# Altium PCB Copy of PCB1.PcbDoc
Units mm, origin at the board's own origin, x right, y up, seen from the top; angles counter-clockwise.
Board outline 113.03 x 60.96 mm, 2 copper layers (L1, L2); 29 components, 32 nets, 145 pads, 8 vias.
Unrouted connection lines stored in the file: 48.
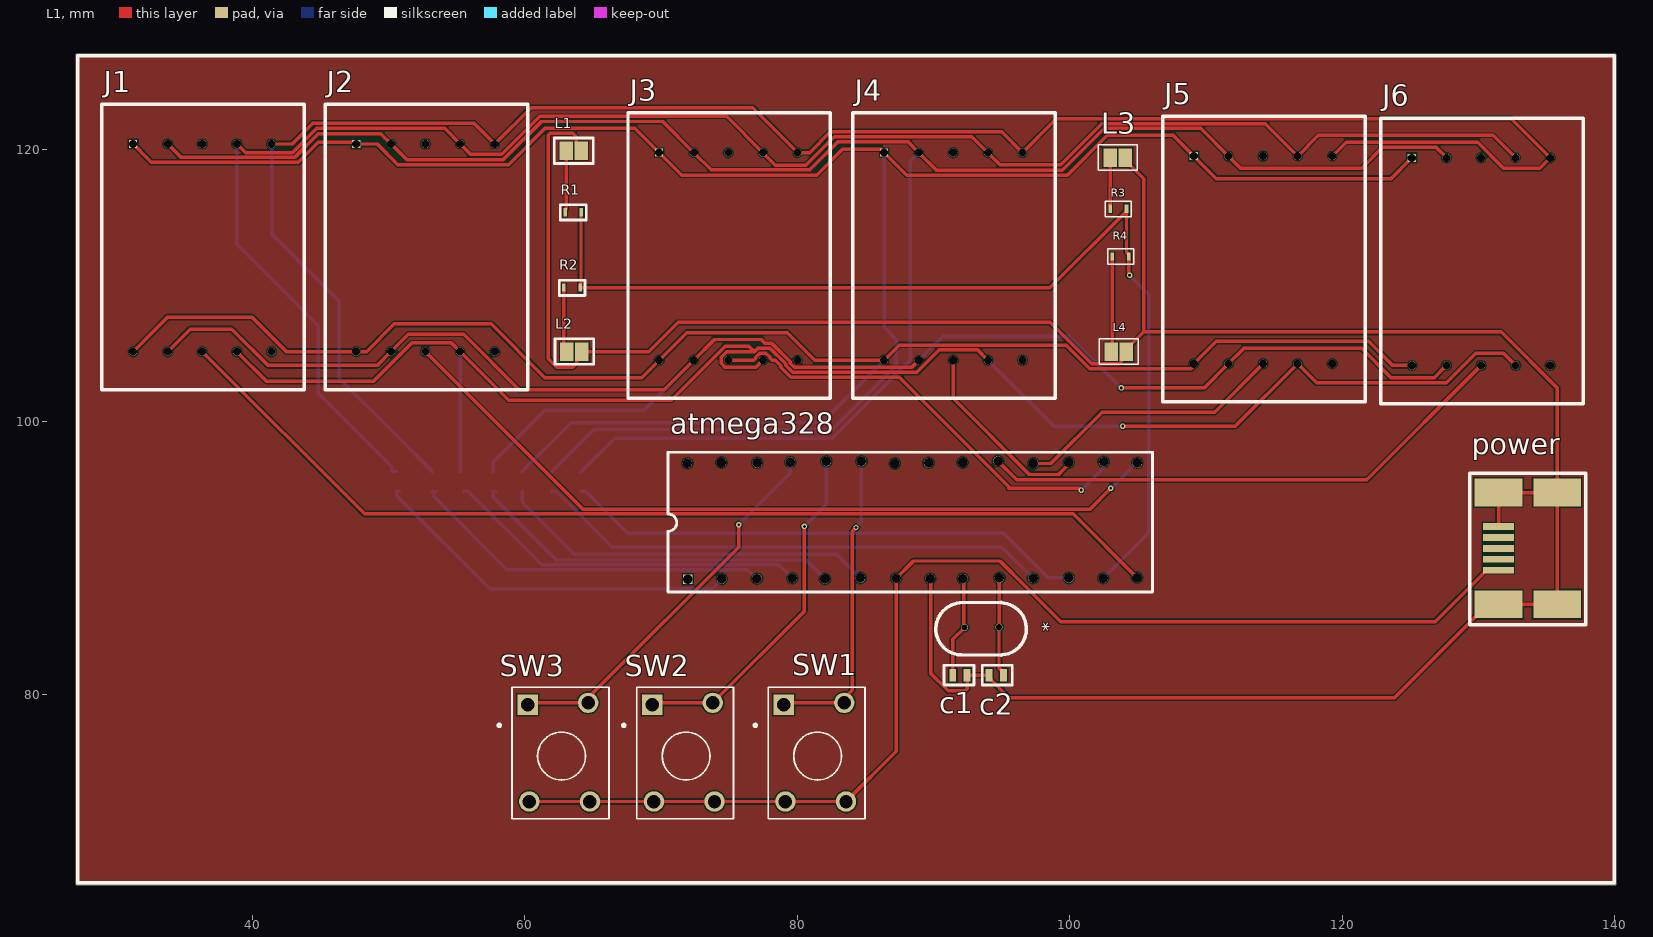
[diagram p0: L1 view]
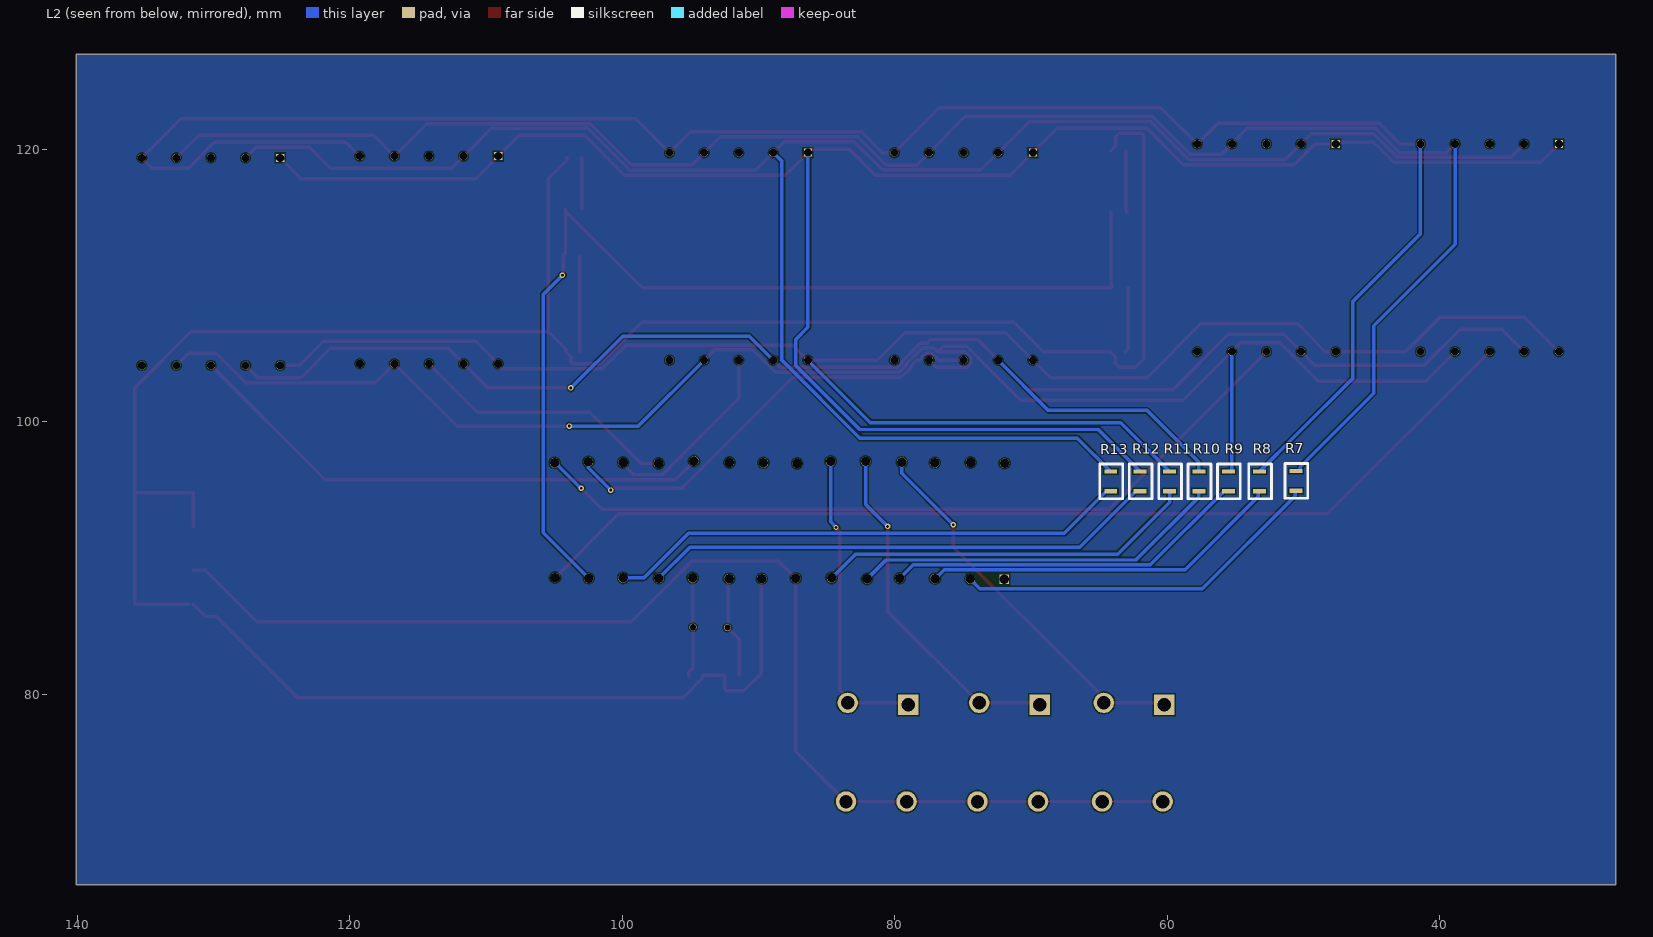
[diagram p1: L2 view, seen from below]

## Layer stack, top to bottom
Top Solder: solder mask 0.0102, Solder Resist, Dk 3.5
L1: signal copper 0.0356
Dielectric 1: dielectric 0.32, FR-4, Dk 4.8
L2: signal copper 0.0356
Bottom Solder: solder mask 0.0102, Solder Resist, Dk 3.5

## Board outline
27.051,66.04 140.081,66.04 140.081,127 27.051,127

## Design rules (kind name [scope] priority, off if disabled: settings)
Clearance [All] p1: gap=0.1 ignorepadtopadclearanceinfootprint=FALSE
PolygonConnect [All] p1: connectstyle=Relief reliefconductorwidth=0.254 reliefentries=4 polygonreliefangle="90 Angle" airgapwidth=0.254
RoutingVias [All] p1: holewidth=0.2 width=0.4 viastyle="Through Hole" minholewidth=0.2 minwidth=0.4 maxholewidth=0.2 maxwidth=0.4
SolderMaskExpansion [All] p1: expansion=0.102 istentingtop=FALSE
Width [All] p1: maxlimit=0.5 minlimit=0.254 preferedwidth=0.254
30 further rules are at their usual default settings.

## Components (designator, comment, footprint, x,y, rotation, side; value= is the part's Value field where it differs from the comment)
* "crystal_osci" CRYSTAL_16MHZ 93.472,84.328 r180 top
atmega328 "atmega328p" IC_BASE_HOLDER 71.774,88.794 r90 top
c1 "12pF" CAPACITOR0805_12PF 91.956,81.407 r0 top
c2 "12pF" CAPACITOR0805_12PF 94.573,81.407 r180 top
J1 "7_seg_display_comm_cath" 7SEG 31.242,120.396 r0 top
J2 "7_seg_display_comm_cath" 7SEG 47.625,120.396 r0 top
J3 "7_seg_display_comm_cath" 7SEG 69.85,119.761 r0 top
J4 "7_seg_display_comm_cath" 7SEG 86.36,119.761 r0 top
J5 "7_seg_display_comm_cath" 7seg 109.093,119.507 r0 top
J6 "7_seg_display_comm_cath" 7seg 125.095,119.38 r0 top
L1 "RED_led" "LED_LSM0805 SERIES_RED" 63.585,119.888 r0 top
L2 "RED_led" "LED_LSM0805 SERIES_RED" 63.627,105.156 r0 top
L3 "RED_led" "led_LSM0805 Series_red" 103.505,119.38 r0 top
L4 "RED_led" "led_LSM0805 Series_red" 103.59,105.156 r0 top
power "U5" USB_MINI_20 131.463,94.814 r180 top
R1 "resistor_150_smd" RESISTOR_150_SMD 63.5,115.316 r0 top
R2 "resistor_150_smd" RESISTOR_150_SMD 63.415,109.78 r0 top
R3 "resistor_150_smd" Resistor_150_smd 103.505,115.57 r0 top
R4 "resistor_150_smd" Resistor_150_smd 103.674,112.066 r0 top
R7 "resistor_1k_smd" RESISTOR_ERJUP3_1K 50.546,95.668 r270 bottom
R8 "resistor_1k_smd" RESISTOR_ERJUP3_1K 53.213,95.631 r270 bottom
R9 "resistor_1k_smd" RESISTOR_ERJUP3_1K 55.499,95.631 r270 bottom
R10 "resistor_1k_smd" RESISTOR_ERJUP3_1K 57.658,95.631 r270 bottom
R11 "resistor_1k_smd" RESISTOR_ERJUP3_1K 59.817,95.631 r270 bottom
R12 "resistor_1k_smd" RESISTOR_ERJUP3_1K 61.976,95.631 r270 bottom
R13 "resistor_1k_smd" RESISTOR_ERJUP3_1K 64.135,95.631 r270 bottom
SW1 "1825910-2" TE_1825910-2 78.232,77.724 r0 top
SW2 "1825910-2" TE_1825910-2 68.58,77.724 r0 top
SW3 "1825910-2" TE_1825910-2 59.436,77.724 r0 top

## Footprints (in the part's own frame and the unit in brackets; to place one, negate y for a bottom-side part, rotate by r counter-clockwise, add the part's x,y. Pads: shape width x height; smd on the part's side, far side on the other; paste and mask are expansions set on the pad)
7SEG [mm]
  rect 0.6x0.6 hole 0.6: 1(0,0)
  round 0.6 hole 0.6: 2(2.55,0) 3(5.08,0) 4(7.62,0) 5(10.16,0) 6(10.16,-15.24) 7(7.62,-15.24) 8(5.08,-15.24) 9(2.54,-15.24) 10(0,-15.24)
  silkscreen extent -2.29,-18.03 12.57,2.92, body extent -1.22,-17.12 11.38,1.88, height 8.82
7seg [mm]
  rect 0.6x0.6 hole 0.6: 1(0,0)
  round 0.6 hole 0.6: 2(2.55,0) 3(5.08,0) 4(7.62,0) 5(10.16,0) 6(10.16,-15.24) 7(7.62,-15.24) 8(5.08,-15.24) 9(2.54,-15.24) 10(0,-15.24)
  silkscreen extent -2.29,-18.03 12.57,2.92, body extent -1.22,-17.12 11.38,1.88, height 8.82
CAPACITOR0805_12PF [mm]
  rect 0.5x0.9 smd: 1(-0.55,0) 2(0.5,0)
  silkscreen extent -1.2,-0.72 1,0.73, body extent -0.83,-0.4 0.77,0.4, height 0.46
CRYSTAL_16MHZ [mm]
  round 0.5 hole 0.457: 1(-1.325,-0.6) 2(1.2,-0.575)
  silkscreen extent -3.33,-2.43 3.31,1.45, body extent -3.45,-2.57 3.35,1.43, height 1.81
IC_BASE_HOLDER [mm]
  rect 0.7x0.7 hole 0.7: 1(-0.35,-0.175)
  round 0.7 hole 0.7: 2(-0.325,-2.675) 3(-0.3,-5.25) 4(-0.275,-7.85) 5(-0.325,-10.25) 6(-0.25,-12.85) 7(-0.275,-15.475) 8(-0.3,-17.975) 9(-0.3,-20.37) 10(-0.25,-23.05) 11(-0.275,-25.525) 12(-0.25,-28.15) 13(-0.275,-30.675) 14(-0.225,-33.15) 15(8.2,-33.175) 16(8.275,-30.7) 17(8.225,-28.15) 18(8.15,-25.55) 19(8.325,-22.95) 20(8.225,-20.35) 21(8.2,-17.85) 22(8.15,-15.375) 23(8.3,-12.925) 24(8.3,-10.35) 25(8.25,-7.7) 26(8.2,-5.275) 27(8.225,-2.65) 28(8.17,-0.15)
  silkscreen extent -1.28,-34.29 8.98,1.27, body extent -0.9,-33.95 8.77,0.65, height 4
"LED_LSM0805 SERIES_RED" [mm]
  rect 1x1.35 smd: A(-0.55,0) K(0.55,0)
  silkscreen extent -1.43,-0.92 1.43,0.95, body extent -1.03,-0.62 0.97,0.62, height 1.11
"led_LSM0805 Series_red" [mm]
  rect 1x1.35 smd: A(-0.55,0) K(0.55,0)
  silkscreen extent -1.43,-0.92 1.43,0.95, body extent -1.03,-0.62 0.97,0.62, height 1.11
RESISTOR_150_SMD [mm]
  rect 0.26x0.6 smd: 1(-0.55,0.075) 2(0.65,0.075)
  silkscreen extent -0.9,-0.5 1,0.63, body extent -0.75,-0.32 0.85,0.48, height 0.46
Resistor_150_smd [mm]
  rect 0.26x0.6 smd: 1(-0.55,0.075) 2(0.65,0.075)
  silkscreen extent -0.9,-0.5 1,0.63, body extent -0.75,-0.32 0.85,0.48, height 0.46
RESISTOR_ERJUP3_1K [mm]
  rect 0.3x0.95 smd: 1(-0.725,0) 2(0.725,0)
  silkscreen extent -1.27,-0.8 1.28,0.87, body extent -0.8,-0.4 0.8,0.4, height 0.46
TE_1825910-2 [mil]
  rect 58.98x58.98 hole 38.98: 1(30,60)
  round 58.98 hole 38.98: 2(205,65) 3(35,-220) 4(210,-220)
  silkscreen extent -56,-270 265,110, body extent 2,-234 238,74, height 170
USB_MINI_20 [mm]
  rect 2.25x0.5 smd: 1(0,5.7) 2(0,2.5) 4(0,4.1) D+(0,4.9) D-(0,3.3)
  rect 3.5x2.05 smd: 2(-4.3,8.2) 2(-4.3,0) 2(0,8.2) 2(0,0)
  silkscreen extent -6.4,-1.4 2.1,9.7, body extent -8,-0.85 1.2,9.05, height 3.86

## Part data
c1 c2: library part capacitor12pico
power: library part "USB CONNECTOR"
SW1 SW2 SW3: "SWITCH TACTILE SPST-NO 0.05A 24V", Package=None, Availability=Unavailable, MP=1825910-2, Price=None

## Via types
v1: diameter 0.4, hole 0.2, L1 to L2, 8 vias

## Nets (pads, with @x,y where several pads share a name; then routed paths per layer and width w, separated by ;. In a path a pad name is that pad's centre, name@x,y a point inside that pad or via, vN(x,y) a via of type N, cw(c..) or ccw(c..) an arc to the next point about the centre after c; other vN are vias at no path point)
+5V: atmega328.7 power.1 SW1.3 SW1.4 SW2.3 SW2.4 SW3.3 SW3.4 | length 89.3
  L1 w0.254: SW3.3 SW3.4 SW2.3 SW2.4 SW1.3 SW1.4 87.249,75.819 atmega328.7 88.519,89.789 94.869,89.789 96.722,87.936 99.314,85.344 126.818,85.344 130.588,89.114 power.1
a: J1.4 J2.4 J3.4 J4.4 J5.4 J6.4 R7.1 | length 132.6
  L1 w0.254: J1.4 39.497,119.761 42.941,119.761 44.719,121.539 54.102,121.539 J2.4 56.007,119.634 58.293,119.634 61.087,122.428 74.803,122.428 J3.4 78.386,118.845 80.618,118.845 82.704,120.931 92.81,120.931 94.046,119.695 94.869,118.872 99.314,118.872 102.335,121.893 114.327,121.893 J5.4 118.237,121.031 131.064,121.031 J6.4
  L2 w0.254: J1.4 38.862,113.03 44.831,107.061 44.831,102.108 50.218,96.721 50.218,96.416 50.241,96.393 R7.1
a_com: atmega328.2 R7.2 | length 27.7
  L2 w0.15: R7.2 R7.2@50.871,94.943
  L2 w0.254: R7.2 50.577,94.943 50.6,94.92 50.6,94.561 57.404,87.757 73.737,87.757 atmega328.2
b: J1.5 J2.5 J3.5 J4.5 J5.5 J6.5 R8.1 | length 147.5
  L1 w0.254: J1.5 42.909,120.396 44.433,121.92 56.261,121.92 J2.5 60.452,123.063 76.708,123.063 J3.5 80.899,119.761 82.423,121.285 94.996,121.285 J4.5 99.006,122.247 132.388,122.247 J6.5 134.493,118.618 131.826,118.618 129.921,120.523 120.269,120.523 J5.5
  L2 w0.254: J1.5 41.402,113.804 46.355,108.851 46.355,103.214 50.509,99.06 R8.1
b_com: atmega328.3 R8.2 | length 27
  L2 w0.15: R8.2 R8.2@53.538,94.906
  L2 w0.254: R8.2 53.281,94.906 53.304,94.883 53.304,94.524 58.674,89.154 76.364,89.154 atmega328.3
c: J1.7 J2.7 J3.7 J4.7 J5.7 J6.7 R9.1 | length 122.3
  L1 w0.254: J1.7 41.021,102.997 48.895,102.997 51.689,105.791 54.61,105.791 J2.7 58.801,101.6 70.739,101.6 74.703,105.564 76.427,105.564 76.847,105.144 ; J3.7 76.943,103.994 74.712,103.994 74.403,104.303 74.403,104.739 74.808,105.144 76.847,105.144 ; J4.7 93.218,105.283 90.407,105.283 88.764,103.64 79.645,103.64 79.129,104.156 79.129,104.259 77.986,105.402 77.105,105.402 76.847,105.144 ; v1(103.886,99.695) 112.141,99.695 J5.7 118.11,102.87 127.635,102.87 129.794,105.029 131.826,105.029 J6.7
  L2 w0.254: R9.1@55.245,96.356 J2.7 ; J4.7 98.806,99.695 v1(103.886,99.695)
c_com: atmega328.4 R9.2 | length 26.8
  L2 w0.254: R9.2 55.824,94.906 61.222,89.508 78.635,89.508 atmega328.4
d: J1.9 J2.9 J3.9 J4.9 J5.9 J6.9 R10.1 | length 124.2
  L1 w0.254: J1.9 35.433,106.807 38.481,106.807 41.148,104.14 49.149,104.14 J2.9 51.435,106.426 55.499,106.426 59.563,102.362 70.231,102.362 J3.9 73.914,106.045 77.343,106.045 77.632,105.756 78.133,105.756 79.483,104.406 79.483,104.303 79.792,103.994 88.373,103.994 J4.9 ; v1(103.759,102.489) 109.855,102.489 J5.9 112.776,105.41 121.412,105.41 123.571,103.251 126.746,103.251 J6.9
  L2 w0.254: R10.1 57.658,97.028 59.563,98.933 61.468,100.838 68.707,100.838 J3.9 ; J4.9 90.678,106.299 99.949,106.299 v1(103.759,102.489)
D1: atmega328.14 J1.8 | length 75.5
  L1 w0.254: J1.8 48.233,93.245 100.248,93.245 atmega328.14
D2: atmega328.15 J2.8 | length 58.4
  L1 w0.254: J2.8 64.262,93.599 101.473,93.599 v1(102.997,95.123)
  L2 w0.254: v1(102.997,95.123) 103.037,95.123 104.908,96.994 atmega328.15
D3: atmega328.16 J3.8 | length 33.3
  L1 w0.254: J3.8 76.794,104.521 76.943,104.67 76.943,104.739 77.252,105.048 77.688,105.048 77.997,104.739 77.997,104.67 78.146,104.521 78.366,104.521 78.775,104.112 78.775,104.009 79.506,103.278 87.476,103.278 92.583,98.171 95.504,95.25 95.504,95.123 100.711,95.123 v1(100.838,94.996)
  L2 w0.254: v1(100.838,94.996) 102.474,96.632 atmega328.16
D4: atmega328.17 J4.8 | length 14
  L1 w0.254: J4.8 91.44,101.727 97.028,96.139 99.165,96.139 99.479,96.453 ; 99.479,96.454 99.924,96.898 atmega328.17
D5: atmega328.18 J5.8 | length 19.9
  L1 w0.254: atmega328.18 98.595,96.944 102.362,100.711 110.617,100.711 J5.8
D6: atmega328.19 J6.8 | length 39.5
  L1 w0.254: atmega328.19 96.085,95.758 121.793,95.758 J6.8
d_com: atmega328.5 R10.2 | length 27.6
  L2 w0.15: R10.2 R10.2@57.983,94.906
  L2 w0.254: R10.2 57.658,94.488 62.284,89.862 80.631,89.862 atmega328.5
e: J1.10 J2.10 J3.10 J4.10 J5.10 J6.10 R11.1 | length 133.2
  L1 w0.254: J1.10 32.736,106.65 33.782,107.696 39.958,107.696 42.498,105.156 J2.10 48.387,105.156 50.419,107.188 57.531,107.188 61.468,103.251 68.58,103.251 J3.10 71.882,106.553 79.248,106.553 81.28,104.521 J4.10 87.476,105.637 99.722,105.637 101.459,103.9 108.899,103.9 J5.10@109.093,104.094 ; J5.10 110.744,105.918 121.92,105.918 123.698,104.14 J6.10
  L2 w0.254: R11.1 63.41,99.949 81.788,99.949 J4.10
e_com: atmega328.6 R11.2 | length 27.9
  L2 w0.254: R11.2 59.817,94.488 59.817,94.107 63.627,90.297 82.871,90.297 atmega328.6
f: J1.2 J2.2 J3.2 J4.2 J5.2 J6.2 R13.1 | length 146.6
  L1 w0.254: J1.2 34.781,119.407 43.087,119.407 44.838,121.158 49.413,121.158 J2.2 51.345,119.226 58.393,119.226 61.214,122.047 70.114,122.047 J3.2 73.67,118.491 80.899,118.491 82.985,120.577 88.094,120.577 J4.2 90.207,118.464 99.441,118.464 102.516,121.539 109.611,121.539 J5.2 111.643,119.497 112.522,118.618 121.412,118.618 122.946,120.152 126.873,120.152 J6.2
  L2 w0.254: R13.1 66.585,98.806 82.55,98.806 88.265,104.521 88.265,119.116 J4.2
f_com: atmega328.11 R12.2 | length 38
  L2 w0.254: R12.2 62.301,94.906 66.402,90.805 95.013,90.805 atmega328.11
g: J1.1 J2.1 J3.1 J4.1 J5.1 J6.1 R12.1 | length 147.4
  L1 w0.254: J1.1 32.385,119.253 32.585,119.053 43.361,119.053 44.831,120.523 47.498,120.523 J2.1 49.149,120.396 50.673,118.872 58.803,118.872 61.47,121.539 68.072,121.539 J3.1 71.501,118.11 81.407,118.11 83.312,120.015 86.106,120.015 J4.1 88.011,118.11 99.822,118.11 102.743,121.031 107.569,121.031 110.744,117.856 123.571,117.856 J6.1
  L2 w0.254: R12.1 65.061,99.441 82.55,99.441 87.249,104.14 87.249,106.045 86.36,106.934 J4.1
g_com: atmega328.12 R13.2 | length 38.4
  L2 w0.254: R13.2 64.46,94.906 67.545,91.821 95.123,91.821 98.4,88.544 atmega328.12
GND: atmega328.8 c1.2 c2.2 L1.K L2.K L3.K L4.K power.2 | length 193.8
  L1 w0.254: L1.K 63.762,120.261 63.762,120.923 63.5,121.185 61.871,121.185 61.722,121.036 61.722,104.641 62.35,104.013 63.5,104.013 63.804,104.317 63.804,104.783 L2.K 69.088,105.156 71.247,107.315 98.552,107.315 101.613,104.254 103.634,104.254 103.767,104.387 103.767,104.783 L4.K 104.14,105.331 105.41,106.601 ; atmega328.8 89.789,88.454 89.789,81.534 91.059,80.264 92.307,80.264 92.456,80.413 c1.2 c2.2 94.073,81.207 95.524,79.756 123.825,79.756 129.785,85.716 130.565,85.716 power.2@131.463,86.614 ; L3.K 104.055,119.205 105.41,117.85 105.41,106.601 ; power.2@131.463,92.314 131.463,94.814 power.2@135.763,94.814 ; power.2@131.826,86.614 135.763,86.614 power.2@135.763,94.814 ; 105.41,106.601 131.651,106.601 135.763,102.489 power.2@135.763,94.814
led: atmega328.13 R1.2 R2.2 R3.2 R4.2 | length 77.2
  L1 w0.254: R1.2 64.147,115.388 64.147,115.138 64.115,115.105 64.115,110.155 64.068,110.108 64.068,109.858 R2.2 98.535,109.855 104.152,115.472 R3.2@104.155,115.475 ; R3.2 R3.2@104.155,115.475 ; v1(104.376,110.762) 104.376,110.801 104.324,110.854 104.324,112.311 104.321,112.314 104.304,112.314 104.155,112.463 R3.2@104.155,115.475
  L2 w0.254: atmega328.13 105.791,91.861 105.791,109.347 v1(104.376,110.762)
Net*_1: *.1 atmega328.10 c2.1 | length 7.3
  L1 w0.254: atmega328.10 94.81,88.531 94.81,84.941 *.1 94.797,81.933 95.123,81.607 c2.1 c2.1@95.151,81.435
Net*_2: *.2 atmega328.9 c1.1 | length 7.5
  L1 w0.254: c1.1 91.406,84.037 *.2 92.225,84.95 92.225,88.413 atmega328.9
Netatmega328_23: atmega328.23 SW1.1 SW1.2 | length 22.7
  L1 w0.254: SW1.1 79.121,79.375 SW1.2 83.439,79.712 84.036,80.309 84.036,91.954 84.3,92.218 v1(84.3,92.248)
  L2 w0.254: v1(84.3,92.248) 84.3,92.272 84.699,92.671 atmega328.23
Netatmega328_24: atmega328.24 SW2.1 SW2.2 | length 25.7
  L1 w0.254: SW2.1 69.469,79.375 SW2.2 80.518,86.106 v1(80.518,92.329)
  L2 w0.254: v1(80.518,92.329) 82.124,93.935 atmega328.24
Netatmega328_25: atmega328.25 SW3.1 SW3.2 | length 28.3
  L1 w0.254: SW3.1 60.325,79.375 SW3.2 64.643,79.712 64.998,80.066 64.998,80.111 75.692,90.805 v1(75.692,92.456)
  L2 w0.254: v1(75.692,92.456) 79.474,96.238 atmega328.25
NetL1_A: L1.A R1.1 | length 4.5
  L1 w0.254: R1.1 62.95,115.561 63.035,115.646 L1.A
NetL2_A: L2.A R2.1 | length 4.8
  L1 w0.254: R2.1 62.865,105.368 L2.A
NetL3_A: L3.A R3.1 | length 3.7
  L1 w0.254: R3.1 L3.A
NetL4_A: L4.A R4.1 | length 7
  L1 w0.254: L4.A 103.124,105.24 R4.1
pads on no net: atmega328.1 atmega328.20 atmega328.21 atmega328.22 atmega328.26 atmega328.27 atmega328.28 J1.3 J1.6 J2.3 J2.6 J3.3 J3.6 J4.3 J4.6 J5.3 J5.6 J6.3 J6.6 power.4 power.D+ power.D-

## Polygon pours and split planes (outlines as drawn)
no net on L1 "NONET_L01_P000" (solid, pour order 0): 27.051,127 27.051,66.04 140.081,66.04 140.081,127
no net on L2 "NONET_L02_P001" (solid, pour order 1): 27.051,127 27.051,66.04 140.081,66.04 140.081,127

## Silkscreen, mask and mechanical layers (free items; w line width, h text height)
Top Overlay:
  lines w0.254: 27.178,66.167 139.954,66.167 139.954,126.873 27.178,126.873 27.178,66.167

## Text inside footprints (layer, text, board x,y; h text height)
J5: Mechanical 29 "display" at 115.893,112.54 h0.7
J6: Mechanical 29 "display" at 131.895,112.413 h0.7
L3: Mechanical 29 "LED" at 104.385,119.16 h0.3
L4: Mechanical 29 "LED" at 104.47,104.936 h0.3
R3: Mechanical 29 "resistor" at 103.285,115.55 h0.3
R4: Mechanical 29 "resistor" at 103.454,112.046 h0.3